# Altium PCB BlueStone_Terminal_V2.11.PcbDoc (part 1 of 2)
Units mm, origin at the board's own origin, x right, y up, seen from the top; angles counter-clockwise.
Board outline 57 x 62 mm, 2 copper layers (TopLayer, BottomLayer); 39 components, 46 nets, 230 pads, 117 vias.
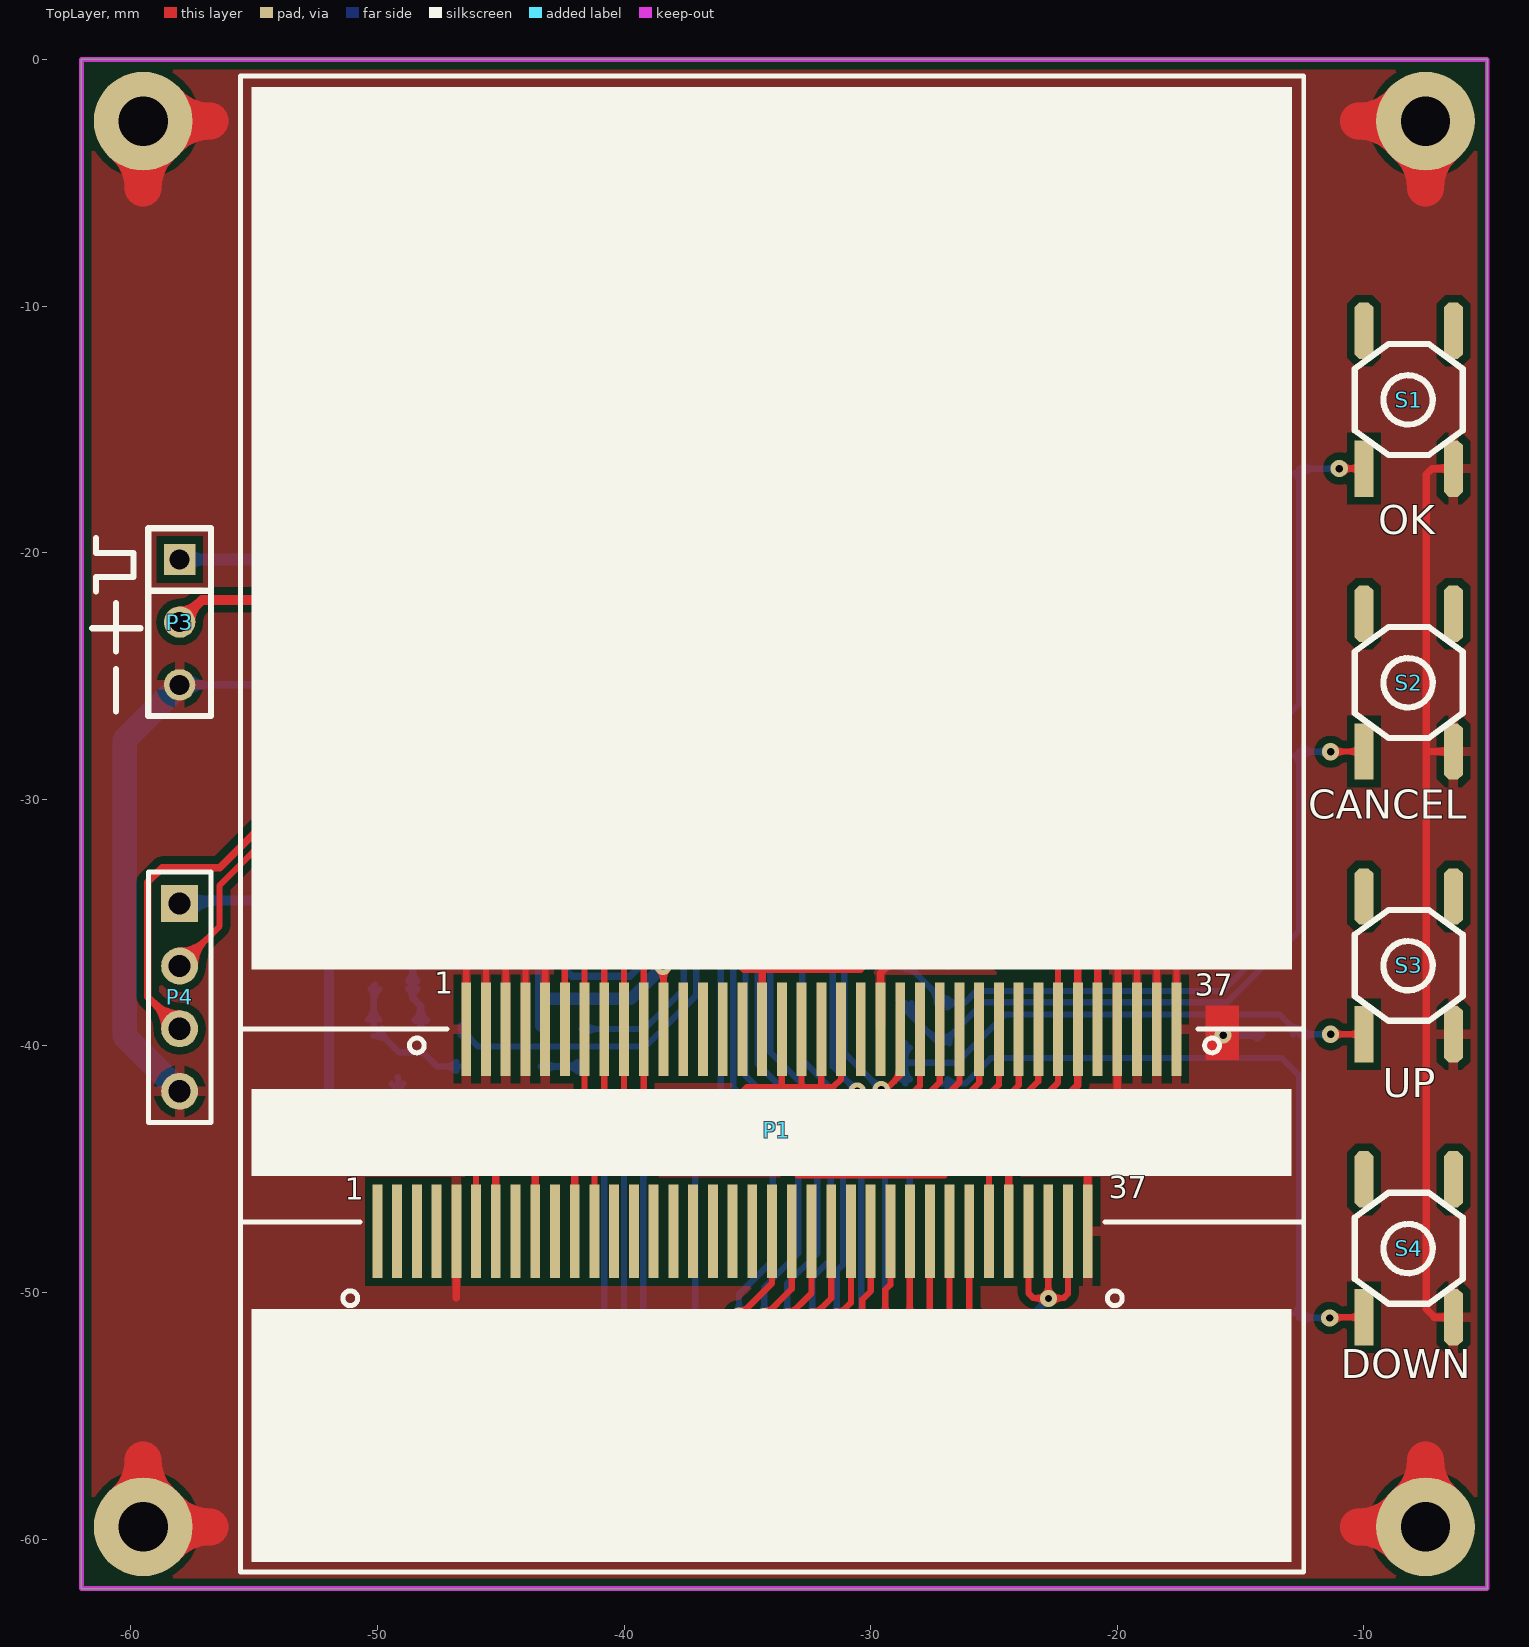
[diagram p0: TopLayer view]
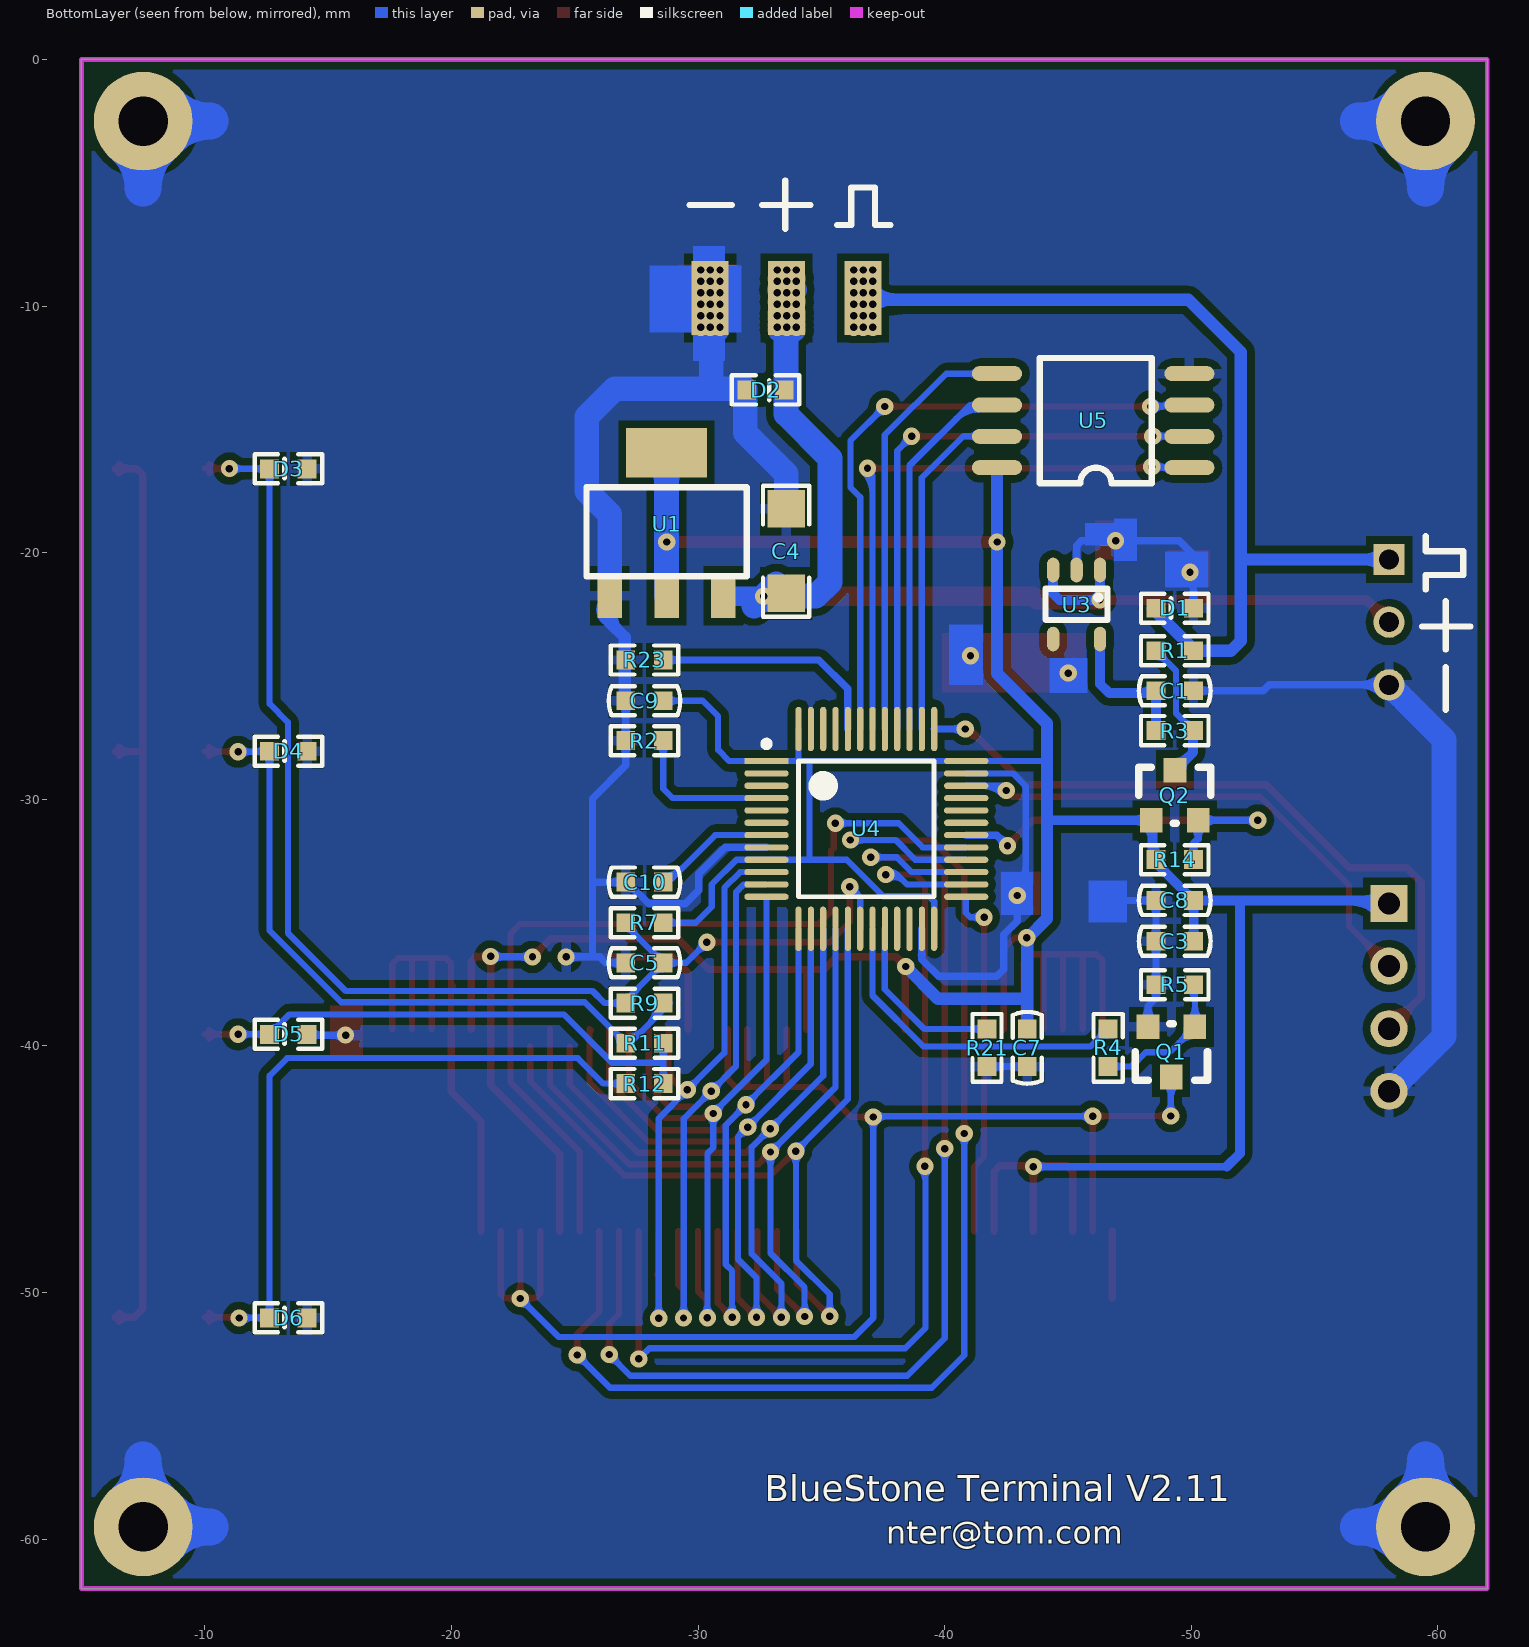
[diagram p1: BottomLayer view, seen from below]

## Layer stack, top to bottom
TopLayer: signal copper 0.0356
Dielectric: core 0.32, FR-4, Dk 4.8
BottomLayer: signal copper 0.0356

## Board outline
-62,-62 -5,-62 -5,0 -62,0

## Design rules (kind name [scope] priority, off if disabled: settings)
Clearance Clearance_2 [All] p1 off: gap=0.3
Clearance Clearance_0 [All] p2: gap=0.203
Clearance Clearance_1 [All] p3 off: gap=0.25
FabricationTestPointUsage TestPointUsage [All] p1: valid=0 allowmultiple=FALSE
FabricationTestpoint Testpoint [All] p1: side=3 testpointundercomponent=TRUE minsize=1.016 maxsize=2.54 preferedsize=1.524 minholesize=0.508 maxholesize=1.016 preferedholesize=0.813 testpointgrid=0.025 allowsidetop=TRUE allowsidebottom=TRUE usegrid=TRUE gridtolerance=0
HoleSize [All] p1: absolutevalues=TRUE maxlimit=10 minlimit=0.025 maxpercent=80.000 minpercent=20.000
PolygonConnect [All] p1: connectstyle=Relief reliefconductorwidth=0.4 reliefentries=4 polygonreliefangle="90 Angle"
RoutingVias [All] p1: holewidth=0.4 width=0.8 viastyle="Through Hole" minholewidth=0.2 minwidth=0.406 maxholewidth=0.711 maxwidth=1.27
SilkscreenOverComponentPads [All] p1: minsilkscreentomaskgap=0.254
SolderMaskExpansion [All] p1: expansion=0.102
Width [All] p1: maxlimit=5 minlimit=0.2 preferedwidth=0.203 minimp=50.000000 maximp=50.000000 favimp=50.000000
24 further rules are at their usual default settings.

## Components (designator, comment, footprint, x,y, rotation, side; value= is the part's Value field where it differs from the comment)
C1 "475" 1608(0603C) -48.568,-25.595 r180 bottom
C3 "475" 1608(0603C) -50.092,-35.75 r0 bottom
C4 "22uF/16V" 3216(1206B) -33.575,-21.65 r90 bottom
C5 "102" 1608(0603C) -28.592,-36.631 r0 bottom
C7 "475" 1608(0603C) -43.353,-39.312 r270 bottom
C8 "475" 1608(0603C) -50.092,-34.1 r0 bottom
C9 "475" 1608(0603C) -28.592,-26.005 r0 bottom
C10 "104" 1608(0603C) -28.592,-33.355 r0 bottom
D1 "PSD05C" SOD523(0603R) -50.09,-22.25 r0 bottom
D2 "PSD12C" SOD523(0603R) -31.975,-13.4 r180 bottom
D3 "PSD05C" SOD523(0603R) -14.15,-16.6 r0 bottom
D4 "PSD05C" SOD523(0603R) -14.15,-28.05 r0 bottom
D5 "PSD05C" SOD523(0603R) -14.15,-39.53 r0 bottom
D6 "PSD05C" SOD523(0603R) -14.15,-51.025 r0 bottom
P1 "37PIN_D1" Z240_D1 -46.4,-40.018 r0 top
P3 "" SIP3 -58.02,-20.275 r270 top
P4 "Header 4" HDR1X4 -58.02,-34.22 r270 top
Q1 "SI2302" SOT-23 -50.15,-39.225 r0 bottom
Q2 "SI2302" SOT-23 -48.375,-30.85 r180 bottom
R1 "18R" 1608(0603R) -50.09,-23.975 r0 bottom
R2 "NC" 1608(0603R) -28.59,-27.62 r0 bottom
R3 "2K 1%" 1608(0603R) -50.09,-27.21 r0 bottom
R4 "2K 1%" 1608(0603R) -46.625,-40.834 r90 bottom
R5 "10K 1%" 1608(0603R) -48.57,-37.515 r180 bottom
R7 "10K 1%" 1608(0603R) -28.59,-35 r0 bottom
R9 "2K 1%" 1608(0603R) -27.07,-38.263 r180 bottom
R11 "2K 1%" 1608(0603R) -27.07,-39.894 r180 bottom
R12 "2K 1%" 1608(0603R) -28.59,-41.525 r0 bottom
R14 "10K 1%" 1608(0603R) -50.09,-32.445 r0 bottom
R21 "10K 1%" 1608(0603R) -41.717,-39.314 r270 bottom
R23 "10K 1%" 1608(0603R) -28.59,-24.35 r0 bottom
S1 "" KEY-3 -10,-16.588 r90 top
S2 "" KEY-3 -10,-28.059 r90 top
S3 "" KEY-3 -10,-39.529 r90 top
S4 "" KEY-3 -10,-51 r90 top
U1 "LM1117-3.3" SOT-223 -31.025,-21.75 r180 bottom
U3 "MIC5205-5.0BM5" SOT23-5 -46.3,-20.7 r270 bottom
U4 "STM32F103C8T6" LQFP48_N -36.825,-31.2 r180 bottom
U5 "W25Q80BVSSIG" "SO-8(Width: 7.8mm)" -49.925,-16.55 r0 bottom

## Footprints (in the part's own frame and the unit in brackets; to place one, negate y for a bottom-side part, rotate by r counter-clockwise, add the part's x,y. Pads: shape width x height; smd on the part's side, far side on the other; paste and mask are expansions set on the pad)
1608(0603C) [mil]
  rect 30x30 smd: 1(0,0) 2(60,0)
  silkscreen extent -27,-23 87,23
1608(0603R) [mil]
  rect 30x30 smd: 1(0,0) 2(60,0)
  silkscreen extent -24,-23 84,23
3216(1206B) [mil]
  rect 60x60 smd: 1(0,0) 2(135,0)
  silkscreen extent -37,-37 172,37
HDR1X4 [mm] "Connector; Header; 4 Position"
  rect 1.5x1.5 hole 0.9: 1(0,0)
  round 1.5 hole 0.9: 2(2.54,0) 3(5.08,0) 4(7.62,0)
  silkscreen extent -1.27,-1.27 8.89,1.27
KEY-3 [mil]
  rect 90x30 smd: 1(0,0)
  oct 90x30 smd: 2(0,-142.89) 3(220,-0.02) 4(220,-142.89)
  silkscreen extent 22,-158 199,15
LQFP48_N [mm]
  rect 1.8x0.25 smd: 1(-4.05,2.75)
  oval 1.8x0.25 smd: 2(-4.05,2.25) 3(-4.05,1.75) 4(-4.05,1.25) 5(-4.05,0.75) 6(-4.05,0.25) 7(-4.05,-0.25) 8(-4.05,-0.75) 9(-4.05,-1.25) 10(-4.05,-1.75) 11(-4.05,-2.25) 12(-4.05,-2.75) 25(4.05,-2.75) 26(4.05,-2.25) 27(4.05,-1.75) 28(4.05,-1.25) 29(4.05,-0.75) 30(4.05,-0.25) 31(4.05,0.25) 32(4.05,0.75) 33(4.05,1.25) 34(4.05,1.75) 35(4.05,2.25) 36(4.05,2.75)
  oval 0.25x1.8 smd: 13(-2.75,-4.05) 14(-2.25,-4.05) 15(-1.75,-4.05) 16(-1.25,-4.05) 17(-0.75,-4.05) 18(-0.25,-4.05) 19(0.25,-4.05) 20(0.75,-4.05) 21(1.25,-4.05) 22(1.75,-4.05) 23(2.25,-4.05) 24(2.75,-4.05) 37(2.75,4.05) 38(2.25,4.05) 39(1.75,4.05) 40(1.25,4.05) 41(0.75,4.05) 42(0.25,4.05) 43(-0.25,4.05) 44(-0.75,4.05) 45(-1.25,4.05) 46(-1.75,4.05) 47(-2.25,4.05) 48(-2.75,4.05)
  silkscreen extent -4.18,-2.75 2.75,3.57
SIP3 [mil]
  rect 50x50 hole 32: 1(0,0)
  round 50 hole 32: 2(100,0) 3(200,0)
  silkscreen extent -50,-50 250,50
"SO-8(Width: 7.8mm)" [mil]
  oval 80x24 smd: 1(0,0) 2(0,-50) 3(0,-100) 4(0,-150) 5(307.09,-150) 6(307.09,-100) 7(307.09,-50) 8(307.09,0)
  silkscreen extent 60,-175 239,25
SOD523(0603R) [mil]
  rect 30x30 smd: 1(0,0) 2(60,0)
  silkscreen extent -24,-23 84,23
SOT23-5 [mm]
  oval 1x0.5 smd: 1(0,0) 2(0,-0.95) 3(0,-1.9) 4(2.8,-1.9) 5(2.8,0)
  silkscreen extent 0.76,-2.21 2.03,0.3
SOT-23 [mil]
  rect 36x39.37 smd: 1(0,0) 2(75,0) 3(38,80)
  silkscreen extent -20,-5 95,85
SOT-223 [mm]
  rect 0.99x1.8 smd: 1(-4.6,0) 2(-2.3,0) 3(0,0)
  rect 3.28x2 smd: 2(-2.3,5.8)
  silkscreen extent -5.55,0.8 0.95,4.4
Z240_D1 [mm]
  rect 0.4x3.8 smd: 1_1(-3.6,-7.5) 1_2(-2.8,-7.5) 1_3(-2,-7.5) 1_4(-1.2,-7.5) 1_5(-0.4,-7.5) 1_6(0.4,-7.5) 1_7(1.2,-7.5) 1_8(2,-7.5) 1_9(2.8,-7.5) 1_10(3.6,-7.5) 1_11(4.4,-7.5) 1_12(5.2,-7.5) 1_13(6,-7.5) 1_14(6.8,-7.5) 1_15(7.6,-7.5) 1_16(8.4,-7.5) 1_17(9.2,-7.5) 1_18(10,-7.5) 1_19(10.8,-7.5) 1_20(11.6,-7.5) 1_21(12.4,-7.5) 1_22(13.2,-7.5) 1_23(14,-7.5) 1_24(14.8,-7.5) 1_25(15.6,-7.5) 1_26(16.4,-7.5) 1_27(17.2,-7.5) 1_28(18,-7.5) 1_29(18.8,-7.5) 1_30(19.6,-7.5) 1_31(20.4,-7.5) 1_32(21.2,-7.5) 1_33(22,-7.5) 1_34(22.8,-7.5) 1_35(23.6,-7.5) 1_36(24.4,-7.5) 1_37(25.2,-7.5) 2_1(0,0.7) 2_2(0.8,0.7) 2_3(1.6,0.7) 2_4(2.4,0.7) 2_5(3.2,0.7) 2_6(4,0.7) 2_7(4.8,0.7) 2_8(5.6,0.7) 2_9(6.4,0.7) 2_10(7.2,0.7) 2_11(8,0.7) 2_12(8.8,0.7) 2_13(9.6,0.7) 2_14(10.4,0.7) 2_15(11.2,0.7) 2_16(12,0.7) 2_17(12.8,0.7) 2_18(13.6,0.7) 2_19(14.4,0.7) 2_20(15.2,0.7) 2_21(16,0.7) 2_22(16.8,0.7) 2_23(17.6,0.7) 2_24(18.4,0.7) 2_25(19.2,0.7) 2_26(20,0.7) 2_27(20.8,0.7) 2_28(21.6,0.7) 2_29(22.4,0.7) 2_30(23.2,0.7) 2_31(24,0.7) 2_32(24.8,0.7) 2_33(25.6,0.7) 2_34(26.4,0.7) 2_35(27.2,0.7) 2_36(28,0.7) 2_37(28.8,0.7)
  silkscreen extent -9.16,-21.31 33.96,39.35

## Part data
C1 C3 C5 C7 C8 C9: library part Cap, "Capacitor"
C4: library part "Cap Pol1", "Polarized Capacitor (Radial)"
C10: library part CAP, "Capacitor"
D1 D2 D3 D4 D5 D6: library part RSBC6.8CS, "Default Diode"
P3: library part "Header 3", "Header, 3-Pin"
P4: "Header, 4-Pin"
Q1 Q2: library part "NMOS  (SOT23)"
R1 R2 R3 R4 R5 R7 R9 R11 R12 R14 R21 R23: library part Res2, "Resistor"
S1 S2 S3 S4: library part SW-PB, "Switch"
U1: library part LM1117
U3: library part MIC5205
U4: library part STM32F103C
U5: library part W55X16

## Free pads (board coordinates)
  round 4 hole 2: 0(-59.5,-59.5) 0(-59.5,-2.5) 0(-7.5,-59.5) 0(-7.5,-2.5)
  rect 1.5x3 smd paste-2 mask-2: 0(-36.69,-9.67) 0(-33.59,-9.67) 0(-30.49,-9.67)
  rect 1.5x3 smd far side: 0(-36.69,-9.67) 0(-33.59,-9.67) 0(-30.49,-9.67)

## Via types
v1: diameter 0.7, hole 0.3, TopLayer to BottomLayer, tented both sides, 117 vias

## Nets (pads, with @x,y where several pads share a name; then routed paths per layer and width w, separated by ;. In a path a pad name is that pad's centre, name@x,y a point inside that pad or via, vN(x,y) a via of type N, cw(c..) or ccw(c..) an arc to the next point about the centre after c; other vN are vias at no path point)
BOOT0: R23.1 U4.44 | length 12.7
  BottomLayer w0.3: -36.075,-25.715 U4.44@-36.075,-27.15 -36.075,-25.523 -34.902,-24.35 R23.1@-28.7,-24.35 ; -29.148,-24.35 ccw(c-29.148,-23.792) -28.753,-24.187 cw(c-29.148,-23.792) -29.148,-24.35 ; -29.148,-24.35 cw(c-29.148,-24.908) -28.753,-24.513 ccw(c-29.148,-24.908) -29.148,-24.35
BOOT1: R21.1 U4.20 | length 9.2
  BottomLayer w0.254: R21.1@-41.717,-39.314 -39.184,-39.314 -37.575,-37.705 U4.20@-37.575,-35.25 ; -41.104,-39.314 ccw(c-41.104,-39.927) -41.538,-39.493 cw(c-41.104,-39.927) -41.104,-39.314 ; -41.104,-39.314 cw(c-41.104,-38.701) -41.538,-39.134 ccw(c-41.104,-38.701) -41.104,-39.314
DGND: C1.2 C3.2 C4.2 C5.2 C7.2 C8.2 C9.2 C10.2 D1.1 D2.1 D3.1 D4.1 D5.1 D6.1 P1.1_5 P1.1_37 P1.2_1 P1.2_2 P1.2_3 P1.2_4 P1.2_5 P1.2_22 P1.2_34 P1.2_35 P1.2_36 P1.2_37 P3.3 P4.4 pad.0@-7.5,-2.5 pad.0@-7.5,-59.5 pad.0@-30.49,-9.67 pad.0@-59.5,-2.5 pad.0@-59.5,-59.5 Q1.2 R2.2 R5.1 R21.2 R23.2 S1.2 S2.2 S3.2 S4.2 U1.1 U3.2 U4.8 U4.23 U4.35 U4.47 U5.4 | length 461.6
  TopLayer w0.254: P1.2_1@-46.4,-39.318 -46.4,-36.53 -46.15,-36.28 -45.53,-36.28 ; P1.2_2@-45.6,-39.318 -45.6,-36.35 -45.53,-36.28 ; P1.2_3@-44.8,-39.318 -44.8,-36.33 -44.75,-36.28 ; P1.2_4@-44,-39.318 -44,-36.32 -43.96,-36.28 ; P1.2_5@-43.2,-39.318 -43.2,-36.64 -43.55,-36.29 -43.612,-36.29 -43.622,-36.28 -43.96,-36.28 ; P1.2_34@-20,-39.318 -19.98,-39.298 -19.98,-36.65 -19.76,-36.43 -19.18,-36.43 ; P1.2_35@-19.2,-39.318 -19.2,-36.45 -19.18,-36.43 ; P1.2_36@-18.4,-39.318 -18.4,-36.5 -18.33,-36.43 ; P1.2_37@-17.6,-39.318 -17.6,-36.67 -17.84,-36.43 -18.33,-36.43 ; -45.53,-36.28 -44.75,-36.28 ; -44.75,-36.28 -43.96,-36.28 ; -19.18,-36.43 -18.33,-36.43 ; P1.2_34@-20.052,-37.566 ccw(c-20.225,-37.393) -19.98,-37.393 cw(c-20.225,-37.393) P1.2_34@-20.052,-37.566
  TopLayer w0.3: -46.8,-50.22 P1.1_5@-46.8,-47.518 ; P1.2_22@-29.6,-39.318 -29.6,-37.05 -28.94,-36.39 ; -28.92,-36.37 -28.94,-36.39 ; v1@-24.67,-36.37 v1(-24.65,-36.39) -28.94,-36.39 ; P1.1_37@-21.2,-47.518 -21.2,-43.05 -20,-41.85 P1.2_34@-20,-39.318 ; S4.2@-6.37,-51 -7.14,-51 -7.48,-50.66 -7.48,-28.17 ; S2.2@-6.37,-28.059 -7.369,-28.059 -7.48,-28.17 ; S1.2@-6.37,-16.588 -7.238,-16.588 -7.48,-16.83 -7.48,-28.17 ; -25.133,-36.39 ccw(c-25.133,-35.907) -24.791,-36.249 cw(c-25.133,-35.907) -25.133,-36.39 ; -25.133,-36.39 cw(c-25.133,-36.873) -24.791,-36.531 ccw(c-25.133,-36.873) -25.133,-36.39 ; -6.928,-51 ccw(c-6.928,-50.442) -6.534,-50.837 cw(c-6.928,-50.442) -6.928,-51 ; -6.928,-51 cw(c-6.928,-51.558) -6.534,-51.163 ccw(c-6.928,-51.558) -6.928,-51 ; -6.928,-28.059 ccw(c-6.928,-27.501) -6.534,-27.895 cw(c-6.928,-27.501) -6.928,-28.059 ; -6.928,-28.059 cw(c-6.928,-28.616) -6.534,-28.222 ccw(c-6.928,-28.616) -6.928,-28.059 ; -6.928,-16.588 ccw(c-6.928,-16.03) -6.534,-16.425 cw(c-6.928,-16.03) -6.928,-16.588 ; -6.928,-16.588 cw(c-6.928,-17.146) -6.534,-16.751 ccw(c-6.928,-17.146) -6.928,-16.588
  TopLayer w1.5: -59.5,-5.21 pad.0@-59.5,-2.5 -56.79,-2.5 ; -7.5,-5.21 pad.0@-7.5,-2.5 -10.21,-2.5 ; -59.5,-56.79 ccw(c-57.188,-56.79) -58.689,-58.549 cw(c-57.188,-56.79) -59.5,-56.79 ; -59.5,-56.79 cw(c-61.812,-56.79) -60.311,-58.549 ccw(c-61.812,-56.79) -59.5,-56.79 ; -59.5,-56.79 pad.0@-59.5,-59.5 -56.79,-59.5 ; -59.5,-5.21 ccw(c-61.812,-5.21) -60.311,-3.451 cw(c-61.812,-5.21) -59.5,-5.21 ; -59.5,-5.21 cw(c-57.188,-5.21) -58.689,-3.451 ccw(c-57.188,-5.21) -59.5,-5.21 ; -56.79,-59.5 ccw(c-56.79,-61.812) -58.549,-60.311 cw(c-56.79,-61.812) -56.79,-59.5 ; -56.79,-59.5 cw(c-56.79,-57.188) -58.549,-58.689 ccw(c-56.79,-57.188) -56.79,-59.5 ; -56.79,-2.5 ccw(c-56.79,-4.812) -58.549,-3.311 cw(c-56.79,-4.812) -56.79,-2.5 ; -56.79,-2.5 cw(c-56.79,-0.188) -58.549,-1.689 ccw(c-56.79,-0.188) -56.79,-2.5 ; -10.21,-59.5 ccw(c-10.21,-57.188) -8.451,-58.689 cw(c-10.21,-57.188) -10.21,-59.5 ; -10.21,-59.5 cw(c-10.21,-61.812) -8.451,-60.311 ccw(c-10.21,-61.812) -10.21,-59.5 ; -10.21,-59.5 pad.0@-7.5,-59.5 -7.5,-56.79 ; -10.21,-2.5 ccw(c-10.21,-0.188) -8.451,-1.689 cw(c-10.21,-0.188) -10.21,-2.5 ; -10.21,-2.5 cw(c-10.21,-4.812) -8.451,-3.311 ccw(c-10.21,-4.812) -10.21,-2.5 ; -7.5,-56.79 ccw(c-5.188,-56.79) -6.689,-58.549 cw(c-5.188,-56.79) -7.5,-56.79 ; -7.5,-56.79 cw(c-9.812,-56.79) -8.311,-58.549 ccw(c-9.812,-56.79) -7.5,-56.79 ; -7.5,-5.21 ccw(c-9.812,-5.21) -8.311,-3.451 cw(c-9.812,-5.21) -7.5,-5.21 ; -7.5,-5.21 cw(c-5.188,-5.21) -6.689,-3.451 ccw(c-5.188,-5.21) -7.5,-5.21
  BottomLayer w0.254: -43.29,-33.85 -43.29,-29.468 -42.772,-28.95 U4.35@-40.875,-28.95 ; -43.29,-33.743 ccw(c-42.783,-33.743) -43.142,-34.102 cw(c-42.783,-33.743) -43.29,-33.743 ; -43.29,-33.13 ccw(c-42.17,-33.13) -42.962,-33.922 cw(c-42.17,-33.13) -43.29,-33.13 ; -43.29,-32.517 ccw(c-41.557,-32.517) -42.782,-33.742 cw(c-41.557,-32.517) -43.29,-32.517
  BottomLayer w0.3: P3.3@-57.995,-25.33 P3.3@-58.02,-25.355 -53.155,-25.355 -52.915,-25.595 -50.05,-25.595 C1.2@-50.06,-25.585 ; D1.1@-49.95,-22.25 -50.08,-22.12 -50.08,-20.08 ; C8.2@-48.568,-34.1 C3.2@-48.568,-35.75 -48.568,-38.057 ; C8.2@-48.44,-34.1 -46.68,-34.1 ; Q1.2@-48.245,-39.225 -48.245,-38.38 -48.568,-38.057 ; U3.2@-45.35,-20.7 -45.35,-19.71 -45.54,-19.52 -49.52,-19.52 -50.08,-20.08 ; C7.2@-43.353,-40.834 R21.2@-41.717,-40.834 ; v1(-42.94,-33.9) -42.94,-34.94 -42.4,-35.48 -42.4,-36.9 -42.12,-37.18 -39.76,-37.18 -39.075,-36.495 U4.23@-39.075,-35.25 ; U4.8@-32.775,-31.95 -31.1,-31.95 -30.03,-33.02 -30.03,-33.68 -29.475,-34.235 -28.01,-34.235 -27.13,-33.355 C10.2@-27.068,-33.355 -25.795,-33.355 ; C5.2@-27.2,-36.631 C5.2@-27.068,-36.631 -26.25,-36.631 -26.009,-36.39 -25.72,-36.39 ; C9.2@-27.068,-26.005 -27.068,-28.622 -25.72,-29.97 -25.72,-36.39 ; v1(-24.65,-36.39) -25.72,-36.39 ; v1@-15.72,-39.57 -14.19,-39.57 D5.1@-14.15,-39.53 ; -56.849,-25.355 ccw(c-56.849,-26.526) -57.677,-25.698 cw(c-56.849,-26.526) -56.849,-25.355 ; -56.849,-25.355 cw(c-56.849,-24.184) -57.677,-25.012 ccw(c-56.849,-24.184) -56.849,-25.355 ; -50.65,-25.595 ccw(c-50.65,-25.037) -50.255,-25.432 cw(c-50.65,-25.037) -50.65,-25.595 ; -50.65,-25.595 cw(c-50.65,-26.153) -50.255,-25.758 ccw(c-50.65,-26.153) -50.65,-25.595 ; -50.08,-20.08 ccw(c-49.351,-20.08) -49.821,-20.637 cw(c-49.351,-20.08) -50.08,-20.08 ; -48.568,-38.057 ccw(c-49.084,-38.057) -48.729,-37.683 cw(c-49.084,-38.057) -48.568,-38.057 ; -48.568,-38.057 cw(c-48.043,-38.057) -48.409,-37.681 ccw(c-48.043,-38.057) -48.568,-38.057 ; -48.568,-36.308 ccw(c-49.126,-36.308) -48.731,-35.913 cw(c-49.126,-36.308) -48.568,-36.308 ; -48.568,-36.308 cw(c-48.01,-36.308) -48.405,-35.913 ccw(c-48.01,-36.308) -48.568,-36.308 ; -48.568,-35.192 ccw(c-48.01,-35.192) -48.405,-35.587 cw(c-48.01,-35.192) -48.568,-35.192 ; -48.568,-35.192 cw(c-49.126,-35.192) -48.731,-35.587 ccw(c-49.126,-35.192) -48.568,-35.192 ; -48.568,-34.658 ccw(c-49.126,-34.658) -48.731,-34.263 cw(c-49.126,-34.658) -48.568,-34.658 ; -48.568,-34.658 cw(c-48.01,-34.658) C8.2@-48.405,-34.263 ; -48.568,-34.658 cw(c-48.01,-34.658) C8.2@-48.405,-34.263 ; C8.2@-48.405,-34.263 cw(c-48.01,-34.658) -48.01,-34.1 ; C8.2@-48.405,-34.263 cw(c-48.01,-34.658) -48.01,-34.1 ; -48.245,-38.441 ccw(c-47.503,-38.441) -48.028,-38.965 cw(c-47.503,-38.441) -48.245,-38.441 ; -48.245,-38.441 cw(c-48.987,-38.441) -48.462,-38.965 ccw(c-48.987,-38.441) -48.245,-38.441 ; -48.01,-34.1 cw(c-48.01,-33.542) -48.405,-33.937 ccw(c-48.01,-33.542) -48.01,-34.1 ; -47.413,-19.52 ccw(c-47.413,-19.037) -47.071,-19.379 cw(c-47.413,-19.037) -47.413,-19.52 ; -47.413,-19.52 cw(c-47.413,-20.003) -47.071,-19.661 ccw(c-47.413,-20.003) -47.413,-19.52 ; -46.447,-19.52 ccw(c-46.447,-20.003) -46.789,-19.661 cw(c-46.447,-20.003) -46.447,-19.52 ; -46.447,-19.52 cw(c-46.447,-19.037) -46.789,-19.379 ccw(c-46.447,-19.037) -46.447,-19.52 ; -42.94,-34.383 ccw(c-43.423,-34.383) -43.081,-34.041 cw(c-43.423,-34.383) -42.94,-34.383 ; -42.94,-34.383 cw(c-42.457,-34.383) -42.799,-34.041 ccw(c-42.457,-34.383) -42.94,-34.383 ; -27.068,-26.563 ccw(c-27.626,-26.563) -27.231,-26.168 cw(c-27.626,-26.563) -27.068,-26.563 ; -27.068,-26.563 cw(c-26.51,-26.563) -26.905,-26.168 ccw(c-26.51,-26.563) -27.068,-26.563 ; -26.51,-36.631 ccw(c-26.51,-37.189) -26.905,-36.795 cw(c-26.51,-37.189) -26.51,-36.631 ; -26.51,-36.631 cw(c-26.51,-36.074) -26.905,-36.468 ccw(c-26.51,-36.074) -26.51,-36.631 ; -26.51,-33.355 ccw(c-26.51,-33.913) -26.905,-33.518 cw(c-26.51,-33.913) -26.51,-33.355 ; -26.51,-33.355 cw(c-26.51,-32.797) -26.905,-33.192 ccw(c-26.51,-32.797) -26.51,-33.355 ; -25.133,-36.39 ccw(c-25.133,-35.907) -24.791,-36.249 cw(c-25.133,-35.907) -25.133,-36.39 ; -25.133,-36.39 cw(c-25.133,-36.873) -24.791,-36.531 ccw(c-25.133,-36.873) -25.133,-36.39 ; D1.1@-50.253,-22.087 ccw(c-50.672,-21.668) -50.08,-21.668 cw(c-50.672,-21.668) D1.1@-50.253,-22.087 ; -50.08,-21.716 ccw(c-49.556,-21.716) -49.927,-22.087 cw(c-49.556,-21.716) -50.08,-21.716 ; -50.08,-21.587 cw(c-49.153,-21.587) -49.809,-20.931 ccw(c-49.153,-21.587) -50.08,-21.587 ; R5.1@-48.733,-37.352 ccw(c-49.133,-36.952) -48.568,-36.952 cw(c-49.133,-36.952) R5.1@-48.733,-37.352 ; -48.568,-36.962 ccw(c-48.017,-36.962) -48.407,-37.352 cw(c-48.017,-36.962) -48.568,-36.962 ; C7.2@-43.19,-40.999 cw(c-42.791,-41.398) -42.791,-40.834 ccw(c-42.791,-41.398) C7.2@-43.19,-40.999 ; C7.2@-43.19,-40.673 ccw(c-42.8,-40.283) -42.8,-40.834 cw(c-42.8,-40.283) C7.2@-43.19,-40.673 ; -42.285,-40.834 cw(c-42.285,-41.405) -41.881,-41.001 ccw(c-42.285,-41.405) -42.285,-40.834 ; -42.265,-40.834 ccw(c-42.265,-40.29) -41.881,-40.675 cw(c-42.265,-40.29) -42.265,-40.834 ; -27.568,-33.793 cw(c-27.068,-34.293) -27.068,-33.586 ccw(c-27.068,-34.293) -27.568,-33.793 ; C10.2@-27.419,-33.644 ccw(c-27.707,-33.355) -27.299,-33.355 cw(c-27.707,-33.355) C10.2@-27.419,-33.644 ; R2.2@-27.229,-27.783 cw(c-27.619,-28.173) -27.068,-28.173 ccw(c-27.619,-28.173) R2.2@-27.229,-27.783 ; R2.2@-27.229,-27.457 ccw(c-27.619,-27.067) -27.068,-27.067 cw(c-27.619,-27.067) R2.2@-27.229,-27.457 ; -27.068,-28.183 cw(c-26.503,-28.183) -26.903,-27.783 ccw(c-26.503,-28.183) -27.068,-28.183 ; -27.068,-27.057 ccw(c-26.503,-27.057) -26.903,-27.457 cw(c-26.503,-27.057) -27.068,-27.057 ; v1@-15.569,-39.701 cw(c-15.251,-40.019) -15.251,-39.57 ccw(c-15.251,-40.019) v1@-15.569,-39.701 ; v1@-15.569,-39.419 ccw(c-15.203,-39.053) -15.203,-39.57 cw(c-15.203,-39.053) v1@-15.569,-39.419 ; -14.804,-39.57 ccw(c-14.804,-38.876) -14.313,-39.367 cw(c-14.804,-38.876) -14.804,-39.57 ; -14.611,-39.57 cw(c-14.611,-39.991) -14.313,-39.693 ccw(c-14.611,-39.991) -14.611,-39.57
  BottomLayer w0.5: C9.2@-27.03,-26.005 -27.03,-23.43 -26.425,-22.825 U1.1@-26.425,-21.75 ; -26.425,-22.746 ccw(c-27.016,-22.746) -26.598,-22.328 cw(c-27.016,-22.746) -26.425,-22.746 ; -26.425,-22.746 cw(c-25.834,-22.746) -26.252,-22.328 ccw(c-25.834,-22.746) -26.425,-22.746 ; C9.2@-27.161,-25.912 ccw(c-27.476,-25.597) -27.03,-25.597 cw(c-27.476,-25.597) C9.2@-27.161,-25.912 ; R23.2@-27.159,-24.443 cw(c-27.469,-24.753) -27.03,-24.753 ccw(c-27.469,-24.753) R23.2@-27.159,-24.443 ; R23.2@-27.159,-24.257 ccw(c-27.469,-23.947) -27.03,-23.947 cw(c-27.469,-23.947) R23.2@-27.159,-24.257 ; -26.695,-23.095 ccw(c-27.136,-22.654) -26.626,-22.296 cw(c-27.136,-22.654) -26.695,-23.095 ; -26.274,-22.674 ccw(c-26.641,-22.307) -26.216,-22.008 cw(c-26.641,-22.307) -26.274,-22.674
  BottomLayer w1: P4.4@-58.02,-41.84 -60.25,-39.61 -60.25,-27.585 P3.3@-58.02,-25.355 ; C4.2@-33.575,-18.221 -33.575,-16.795 -31.91,-15.13 -31.91,-13.35 -26.63,-13.35 -25.49,-14.49 -25.49,-17.51 -26.425,-18.445 U1.1@-26.425,-21.75 ; -30.54,-13.35 pad.0@-30.54,-9.67 ; pad.0@-30.784,-8.894 cw(c-31.373,-9.483) pad.0@-30.54,-9.483 ; pad.0@-30.784,-8.894 cw(c-31.373,-9.483) pad.0@-30.54,-9.483 ; pad.0@-30.784,-8.894 cw(c-31.373,-9.483) pad.0@-30.54,-9.483 ; pad.0@-30.784,-8.894 cw(c-31.373,-9.483) pad.0@-30.54,-9.483 ; pad.0@-30.54,-9.676 cw(c-29.434,-9.676) pad.0@-30.216,-8.894 ; pad.0@-30.54,-9.676 cw(c-29.434,-9.676) pad.0@-30.216,-8.894 ; pad.0@-30.54,-9.676 cw(c-29.434,-9.676) pad.0@-30.216,-8.894 ; pad.0@-30.54,-9.676 cw(c-29.434,-9.676) pad.0@-30.216,-8.894 ; pad.0@-30.784,-10.966 ccw(c-31.373,-10.377) -30.54,-10.377 cw(c-31.373,-10.377) pad.0@-30.784,-10.966 ; pad.0@-30.784,-10.754 cw(c-31.373,-11.343) -30.54,-11.343 ccw(c-31.373,-11.343) pad.0@-30.784,-10.754 ; pad.0@-30.784,-10.501 ccw(c-31.373,-9.912) -30.54,-9.912 cw(c-31.373,-9.912) pad.0@-30.784,-10.501 ; pad.0@-30.784,-10.289 cw(c-31.373,-10.878) -30.54,-10.878 ccw(c-31.373,-10.878) pad.0@-30.784,-10.289 ; pad.0@-30.784,-9.824 cw(c-31.373,-10.413) -30.54,-10.413 ccw(c-31.373,-10.413) pad.0@-30.784,-9.824 ; pad.0@-30.784,-9.359 cw(c-31.373,-9.948) -30.54,-9.948 ccw(c-31.373,-9.948) pad.0@-30.784,-9.359 ; -30.54,-11.536 cw(c-29.434,-11.536) -30.216,-10.754 ccw(c-29.434,-11.536) -30.54,-11.536 ; pad.0@-30.54,-11.071 cw(c-29.434,-11.071) -30.216,-10.289 ccw(c-29.434,-11.071) pad.0@-30.54,-11.071 ; pad.0@-30.54,-10.606 cw(c-29.434,-10.606) -30.216,-9.824 ccw(c-29.434,-10.606) pad.0@-30.54,-10.606 ; pad.0@-30.54,-10.184 ccw(c-29.434,-10.184) -30.216,-10.966 cw(c-29.434,-10.184) pad.0@-30.54,-10.184 ; pad.0@-30.54,-10.141 cw(c-29.434,-10.141) -30.216,-9.359 ccw(c-29.434,-10.141) pad.0@-30.54,-10.141 ; pad.0@-30.54,-9.941 cw(c-29.845,-9.941) -30.183,-9.334 ccw(c-29.845,-9.941) pad.0@-30.54,-9.941 ; pad.0@-30.54,-9.719 ccw(c-29.434,-9.719) -30.216,-10.501 cw(c-29.434,-9.719) pad.0@-30.54,-9.719
  BottomLayer w1.5: -59.5,-5.21 pad.0@-59.5,-2.5 -56.79,-2.5 ; -7.5,-5.21 pad.0@-7.5,-2.5 -10.21,-2.5 ; -59.5,-56.79 ccw(c-57.189,-56.79) -58.689,-58.549 cw(c-57.189,-56.79) -59.5,-56.79 ; -59.5,-56.79 cw(c-61.813,-56.79) -60.311,-58.549 ccw(c-61.813,-56.79) -59.5,-56.79 ; -59.5,-56.79 pad.0@-59.5,-59.5 -56.79,-59.5 ; -59.5,-5.21 ccw(c-61.812,-5.21) -60.311,-3.451 cw(c-61.812,-5.21) -59.5,-5.21 ; -59.5,-5.21 cw(c-57.188,-5.21) -58.689,-3.451 ccw(c-57.188,-5.21) -59.5,-5.21 ; -56.79,-59.5 ccw(c-56.79,-61.812) -58.549,-60.311 cw(c-56.79,-61.812) -56.79,-59.5 ; -56.79,-59.5 cw(c-56.79,-57.188) -58.549,-58.689 ccw(c-56.79,-57.188) -56.79,-59.5 ; -56.79,-2.5 ccw(c-56.79,-4.812) -58.549,-3.311 cw(c-56.79,-4.812) -56.79,-2.5 ; -56.79,-2.5 cw(c-56.79,-0.188) -58.549,-1.689 ccw(c-56.79,-0.188) -56.79,-2.5 ; -10.21,-59.5 ccw(c-10.21,-57.188) -8.451,-58.689 cw(c-10.21,-57.188) -10.21,-59.5 ; -10.21,-59.5 cw(c-10.21,-61.812) -8.451,-60.311 ccw(c-10.21,-61.812) -10.21,-59.5 ; -10.21,-59.5 pad.0@-7.5,-59.5 -7.5,-56.79 ; -10.21,-2.5 ccw(c-10.21,-0.188) -8.451,-1.689 cw(c-10.21,-0.188) -10.21,-2.5 ; -10.21,-2.5 cw(c-10.21,-4.812) -8.451,-3.311 ccw(c-10.21,-4.812) -10.21,-2.5 ; -7.5,-56.79 ccw(c-5.188,-56.79) -6.689,-58.549 cw(c-5.188,-56.79) -7.5,-56.79 ; -7.5,-56.79 cw(c-9.812,-56.79) -8.311,-58.549 ccw(c-9.812,-56.79) -7.5,-56.79 ; -7.5,-5.21 ccw(c-9.812,-5.21) -8.311,-3.451 cw(c-9.812,-5.21) -7.5,-5.21 ; -7.5,-5.21 cw(c-5.188,-5.21) -6.689,-3.451 ccw(c-5.188,-5.21) -7.5,-5.21
  other v1: -15.71,-39.56 -45.01,-24.88 -41.05,-24.18 -49.95,-20.79 -46.93,-19.52 -30.89,-10.86 -30.5,-10.86 -30.11,-10.86 -30.89,-10.395 -30.5,-10.395 -30.11,-10.395 -30.89,-9.93 -30.5,-9.93 -30.11,-9.93 -30.89,-9.465 -30.5,-9.465 -30.11,-9.465 -30.89,-9 -30.5,-9 -30.11,-9 -30.89,-8.535 -30.5,-8.535 -30.11,-8.535
DVDD3.3: C3.1 C7.1 C8.1 C9.1 P1.1_7 P1.1_9 P1.1_11 P1.1_33 P1.2_6 P1.2_11 P1.2_16 P1.2_32 P1.2_33 P4.1 Q2.1 R7.1 R14.2 U1.2 U4.1 U4.9 U4.24 U4.36 U4.48 U5.8 | length 219
  TopLayer w0.254: v1(-43.33,-35.61) -42.84,-35.61 ; P1.2_6@-42.4,-39.318 -42.4,-36.05 -42.84,-35.61 ; -42.84,-35.61 ccw(c-42.84,-36.037) -43.162,-35.756 cw(c-42.84,-36.037) -42.84,-35.61 ; -42.84,-35.61 cw(c-42.84,-35.183) -43.162,-35.464 ccw(c-42.84,-35.183) -42.84,-35.61
  TopLayer w0.3: P1.1_7@-45.2,-47.518 -45.2,-45.1 -44.96,-44.86 -42.24,-44.86 -42,-45.1 P1.1_11@-42,-47.518 ; P1.1_9@-43.6,-47.518 v1(-43.6,-44.89) ; v1(-38.42,-36.78) -38.03,-36.39 -35.63,-36.39 -35.12,-36.9 -34.4,-36.9 ; P1.2_11@-38.4,-39.318 v1@-38.4,-36.8 ; P1.2_16@-34.4,-39.318 -34.4,-36.9 ; P1.1_33@-24.4,-47.518 -24.4,-44.39 -21.6,-41.59 P1.2_32@-21.6,-39.318 v1@-21.6,-36.38 ; v1@-23.28,-36.4 v1(-23.29,-36.39) -24.02,-35.66 -29.19,-35.66 -30.43,-36.9 -34.4,-36.9 ; v1(-21.59,-36.37) v1@-21.6,-36.38 ; P1.2_33@-20.8,-39.318 -20.8,-36.57 -21,-36.37 -21.01,-36.38 v1@-21.6,-36.38 ; v1@-43.741,-45.031 cw(c-44.083,-45.373) -43.6,-45.373 ; v1@-43.741,-45.031 ccw(c-44.155,-45.445) -44.155,-44.86 cw(c-44.155,-45.445) v1@-43.741,-45.031 ; v1@-43.741,-45.031 cw(c-44.083,-45.373) -43.6,-45.373 ; -43.6,-45.373 cw(c-43.117,-45.373) v1@-43.459,-45.031 ; -43.6,-45.373 cw(c-43.117,-45.373) v1@-43.459,-45.031 ; v1@-43.459,-45.031 cw(c-43.045,-45.445) -43.045,-44.86 ccw(c-43.045,-45.445) v1@-43.459,-45.031 ; -38.079,-36.439 ccw(c-37.737,-36.78) -38.22,-36.78 cw(c-37.737,-36.78) -38.079,-36.439 ; -38.079,-36.439 cw(c-38.42,-36.097) -38.42,-36.58 ccw(c-38.42,-36.097) -38.079,-36.439 ; -23.631,-36.049 ccw(c-23.29,-35.707) -23.29,-36.19 cw(c-23.29,-35.707) -23.631,-36.049 ; -23.631,-36.049 cw(c-23.973,-36.39) -23.49,-36.39 ccw(c-23.973,-36.39) -23.631,-36.049 ; v1@-21.449,-36.511 cw(c-21.131,-36.829) -21.131,-36.38 ccw(c-21.131,-36.829) v1@-21.449,-36.511 ; v1@-21.449,-36.511 ccw(c-21.083,-36.877) -21.6,-36.877 cw(c-21.083,-36.877) v1@-21.449,-36.511 ; -44.01,-44.86 ccw(c-44.01,-44.48) -43.741,-44.749 cw(c-44.01,-44.48) -44.01,-44.86 ; v1@-43.459,-44.749 ccw(c-43.19,-44.48) -43.19,-44.86 cw(c-43.19,-44.48) v1@-43.459,-44.749 ; v1@-38.561,-36.921 cw(c-38.951,-37.311) -38.4,-37.311 ccw(c-38.951,-37.311) v1@-38.561,-36.921 ; -38.4,-37.215 cw(c-37.985,-37.215) -38.279,-36.921 ccw(c-37.985,-37.215) -38.4,-37.215 ; v1@-21.731,-36.511 cw(c-22.049,-36.829) -21.6,-36.829 ccw(c-22.049,-36.829) v1@-21.731,-36.511 ; v1@-21.449,-36.229 ccw(c-21.083,-35.863) -21.083,-36.38 cw(c-21.083,-35.863) v1@-21.449,-36.229
  TopLayer w0.5: v1(-42.125,-19.565) v1(-28.73,-19.565)
  BottomLayer w0.254: -44.15,-28.45 U4.36@-40.875,-28.45 -34.52,-28.45 ; U4.24@-39.575,-35.25 -39.575,-34.145 -39.36,-33.93 -37.51,-33.93 -36.03,-32.45 -34.52,-32.45 ; U4.48@-34.075,-27.15 -34.075,-28.45 ; -33.73,-28.45 U4.1@-32.775,-28.45 ; R7.1@-28.86,-35 -29.91,-35 -30.56,-34.35 -30.56,-33.45 -31.56,-32.45 U4.9@-32.775,-32.45 -34.52,-32.45 ; C9.1@-28.592,-26.005 -30.185,-26.005 -30.813,-26.633 -30.813,-27.993 -31.27,-28.45 U4.1@-32.775,-28.45 ; -34.52,-32.45 -34.52,-28.45 ; -34.52,-28.45 -34.075,-28.45 ; -34.075,-28.45 U4.1@-32.775,-28.45 ; -29.205,-26.005 ccw(c-29.205,-25.392) -28.772,-25.825 cw(c-29.205,-25.392) -29.205,-26.005 ; -29.205,-26.005 cw(c-29.205,-26.618) -28.772,-26.185 ccw(c-29.205,-26.618) -29.205,-26.005 ; -29.203,-35 ccw(c-29.203,-34.387) -28.77,-34.82 cw(c-29.203,-34.387) -29.203,-35 ; -29.203,-35 cw(c-29.203,-35.613) -28.77,-35.18 ccw(c-29.203,-35.613) -29.203,-35
  BottomLayer w0.3: -51.44,-44.89 v1(-43.6,-44.89) ; v1(-23.29,-36.39) v1@-21.61,-36.39 ; -44.083,-44.89 ccw(c-44.083,-44.407) -43.741,-44.749 cw(c-44.083,-44.407) -44.083,-44.89 ; -44.083,-44.89 cw(c-44.083,-45.373) -43.741,-45.031 ccw(c-44.083,-45.373) -44.083,-44.89 ; -22.807,-36.39 ccw(c-22.807,-36.873) -23.149,-36.531 cw(c-22.807,-36.873) -22.807,-36.39 ; -22.807,-36.39 cw(c-22.807,-35.907) -23.149,-36.249 ccw(c-22.807,-35.907) -22.807,-36.39 ; -22.121,-36.39 ccw(c-22.121,-35.839) -21.731,-36.229 cw(c-22.121,-35.839) -22.121,-36.39 ; -22.025,-36.39 cw(c-22.025,-36.805) -21.731,-36.511 ccw(c-22.025,-36.805) -22.025,-36.39
  BottomLayer w0.4: P4.1@-58.02,-34.22 -57.9,-34.1 -51.97,-34.1 ; -51.44,-44.89 -51.97,-44.36 -51.97,-34.1 ; C3.1@-50.1,-35.75 C8.1@-50.1,-34.1 ; R14.2@-48.408,-32.445 R14.2@-48.43,-32.445 ; -44.15,-30.85 Q2.1@-48.375,-30.85 -48.43,-30.905 R14.2@-48.43,-32.445 ; -51.97,-34.1 C8.1@-50.1,-34.1 ; -50.529,-34.1 ccw(c-50.529,-33.663) -50.22,-33.972 cw(c-50.529,-33.663) -50.529,-34.1 ; -50.529,-34.1 cw(c-50.529,-34.537) C8.1@-50.22,-34.228 ; -50.529,-34.1 cw(c-50.529,-34.537) C8.1@-50.22,-34.228 ; C8.1@-50.22,-34.228 cw(c-50.51,-34.518) -50.1,-34.518 ccw(c-50.51,-34.518) C8.1@-50.22,-34.228 ; C8.1@-50.1,-34.1 -50.085,-34.1 R14.2@-48.43,-32.445 ; -47.754,-30.85 ccw(c-47.754,-31.471) -48.193,-31.032 cw(c-47.754,-31.471) -47.754,-30.85 ; -47.754,-30.85 cw(c-47.754,-30.229) -48.193,-30.668 ccw(c-47.754,-30.229) -47.754,-30.85 ; P4.1@-57.631,-34.609 cw(c-56.402,-35.838) -56.402,-34.1 ccw(c-56.402,-35.838) P4.1@-57.631,-34.609 ; P4.1@-57.631,-33.831 ccw(c-56.982,-33.182) -56.982,-34.1 cw(c-56.982,-33.182) P4.1@-57.631,-33.831 ; C3.1@-50.22,-35.622 ccw(c-50.51,-35.332) -50.1,-35.332 cw(c-50.51,-35.332) C3.1@-50.22,-35.622 ; -50.1,-35.294 ccw(c-49.636,-35.294) -49.964,-35.622 cw(c-49.636,-35.294) -50.1,-35.294 ; -50.1,-34.556 cw(c-49.636,-34.556) -49.964,-34.228 ccw(c-49.636,-34.556) -50.1,-34.556 ; C8.1@-50.092,-33.919 ccw(c-50.092,-33.465) -49.771,-33.786 cw(c-50.092,-33.465) C8.1@-50.092,-33.919 ; C8.1@-49.911,-34.1 cw(c-49.491,-34.1) -49.788,-33.803 ccw(c-49.491,-34.1) C8.1@-49.911,-34.1 ; -48.971,-32.986 ccw(c-49.512,-32.445) -48.747,-32.445 cw(c-49.512,-32.445) -48.971,-32.986 ; R14.2@-48.694,-32.317 ccw(c-49.331,-31.68) -48.43,-31.68 cw(c-49.331,-31.68) R14.2@-48.694,-32.317 ; Q2.1@-48.557,-31.075 cw(c-48.863,-31.381) -48.43,-31.381 ccw(c-48.863,-31.381) Q2.1@-48.557,-31.075 ; -48.43,-31.647 cw(c-47.621,-31.647) -48.193,-31.075 ccw(c-47.621,-31.647) -48.43,-31.647
  BottomLayer w0.5: C7.1@-43.353,-39.174 -43.353,-38.09 ; U5.8@-42.125,-16.55 v1(-42.125,-19.565) -42.125,-24.895 -44.15,-26.92 -44.15,-28.45 -44.15,-30.85 -44.15,-34.837 -43.353,-35.633 -43.353,-38.09 ; v1(-38.42,-36.78) -39.73,-38.09 -43.353,-38.09
  BottomLayer w1: U1.2@-28.725,-21.75 U1.2@-28.725,-15.95 ; -28.725,-17.157 ccw(c-29.932,-17.157) -29.079,-16.304 cw(c-29.932,-17.157) -28.725,-17.157 ; -28.725,-17.157 cw(c-27.518,-17.157) -28.371,-16.304 ccw(c-27.518,-17.157) -28.725,-17.157
DVDD5.0: C1.1 R3.2 U3.5 | length 9.7
  BottomLayer w0.4: C1.1@-48.568,-25.595 -48.568,-27.047 R3.2@-48.405,-27.21 ; C1.1@-48.39,-25.695 -46.675,-25.695 -46.3,-25.32 U3.5@-46.3,-23.5 ; -48.568,-26.032 ccw(c-49.005,-26.032) -48.696,-25.723 cw(c-49.005,-26.032) -48.568,-26.032 ; -48.568,-26.032 cw(c-48.131,-26.032) -48.44,-25.723 ccw(c-48.131,-26.032) -48.568,-26.032 ; R3.2@-48.694,-27.082 ccw(c-48.998,-26.778) -48.568,-26.778 cw(c-48.998,-26.778) R3.2@-48.694,-27.082 ; -48.568,-26.768 ccw(c-48.124,-26.768) -48.438,-27.082 cw(c-48.124,-26.768) -48.568,-26.768 ; C1.1@-48.44,-25.467 ccw(c-47.89,-24.917) -47.89,-25.695 cw(c-47.89,-24.917) C1.1@-48.44,-25.467
KEY_1: C5.1 D3.2 R7.2 R9.1 S1.1 U4.18 | length 80.4
  TopLayer w0.254: v1(-36.15,-33.54) -36.15,-34.98 -35.34,-35.79 v1(-30.36,-35.79) ; v1@-30.36,-35.931 v1@-30.239,-35.931 ; v1(-10.998,-16.588) S1.1@-10,-16.588 ; -36.15,-34.078 ccw(c-36.688,-34.078) -36.308,-33.698 cw(c-36.688,-34.078) -36.15,-34.078 ; -36.15,-34.078 cw(c-35.612,-34.078) -35.992,-33.698 ccw(c-35.612,-34.078) -36.15,-34.078 ; -30.898,-35.79 ccw(c-30.898,-35.252) -30.518,-35.632 cw(c-30.898,-35.252) -30.898,-35.79 ; -30.898,-35.79 cw(c-30.898,-36.328) -30.518,-35.948 ccw(c-30.898,-36.328) -30.898,-35.79 ; -10.613,-16.588 ccw(c-10.613,-15.975) -10.18,-16.408 cw(c-10.613,-15.975) -10.613,-16.588 ; -10.613,-16.588 cw(c-10.613,-17.201) -10.18,-16.768 ccw(c-10.613,-17.201) -10.613,-16.588 ; -10.46,-16.588 ccw(c-10.46,-17.126) -10.84,-16.746 cw(c-10.46,-17.126) -10.46,-16.588 ; -10.46,-16.588 cw(c-10.46,-16.05) -10.84,-16.43 ccw(c-10.46,-16.05) -10.46,-16.588
  BottomLayer w0.254: U4.18@-36.575,-35.25 -36.575,-33.965 v1(-36.15,-33.54) ; v1(-30.36,-35.79) -29.519,-36.631 C5.1@-28.592,-36.631 ; R9.1@-27.229,-38.263 R9.1@-27.2,-38.263 ; R7.2@-27.229,-35 -27.2,-35 -27.19,-35.01 -27.19,-35.229 C5.1@-28.592,-36.631 ; D3.2@-12.438,-16.588 D3.2@-12.45,-16.6 ; v1(-10.998,-16.588) -11.01,-16.6 D3.2@-12.45,-16.6 ; -36.531,-33.921 ccw(c-36.911,-33.54) -36.373,-33.54 cw(c-36.911,-33.54) -36.531,-33.921 ; -36.531,-33.921 cw(c-36.15,-34.301) -36.15,-33.763 ccw(c-36.15,-34.301) -36.531,-33.921 ; -29.979,-36.171 ccw(c-30.36,-36.551) -30.36,-36.013 cw(c-30.36,-36.551) -29.979,-36.171 ; -29.979,-36.171 cw(c-29.599,-35.79) -30.137,-35.79 ccw(c-29.599,-35.79) -29.979,-36.171 ; -29.205,-36.631 ccw(c-29.205,-36.018) -28.772,-36.452 cw(c-29.205,-36.018) -29.205,-36.631 ; -29.205,-36.631 cw(c-29.205,-37.244) -28.772,-36.811 ccw(c-29.205,-37.244) -29.205,-36.631 ; C5.1@-28.592,-36.631 -27.07,-38.153 R9.1@-27.07,-38.263 -26.21,-38.263 -25.72,-37.773 -24.49,-37.773 -15.723,-37.773 -13.37,-35.42 -13.37,-26.87 -12.626,-26.126 D3.2@-12.626,-16.6 D3.2@-12.45,-16.6 ; C5.1@-28.338,-36.631 cw(c-27.725,-36.631) -28.158,-36.198 ; C5.1@-28.338,-36.631 ccw(c-27.725,-36.631) -28.158,-37.065 ; C5.1@-28.338,-36.631 cw(c-27.725,-36.631) -28.158,-36.198 ; C5.1@-28.338,-36.631 ccw(c-27.725,-36.631) -28.158,-37.065 ; -28.158,-37.065 ccw(c-28.592,-37.498) -28.592,-36.885 cw(c-28.592,-37.498) -28.158,-37.065 ; -28.158,-36.198 cw(c-28.592,-35.764) -28.592,-36.377 ccw(c-28.592,-35.764) -28.158,-36.198 ; -26.457,-38.263 ccw(c-26.457,-38.876) -26.89,-38.442 cw(c-26.457,-38.876) -26.457,-38.263 ; -26.457,-38.263 cw(c-26.457,-37.649) -26.89,-38.083 ccw(c-26.457,-37.649) -26.457,-38.263 ; -12.626,-17.213 ccw(c-13.239,-17.213) -12.806,-16.78 cw(c-13.239,-17.213) -12.626,-17.213 ; -12.626,-17.213 cw(c-12.013,-17.213) D3.2@-12.446,-16.78 ; -12.626,-17.213 cw(c-12.013,-17.213) D3.2@-12.446,-16.78 ; D3.2@-12.446,-16.78 cw(c-12.013,-17.213) -12.013,-16.6 ; D3.2@-12.446,-16.78 cw(c-12.013,-17.213) -12.013,-16.6 ; -12.013,-16.6 cw(c-12.013,-15.987) -12.446,-16.42 ccw(c-12.013,-15.987) -12.013,-16.6 ; -27.581,-37.642 cw(c-28.201,-38.263) -27.324,-38.263 ccw(c-28.201,-38.263) -27.581,-37.642 ; -27.574,-35.613 ccw(c-28.187,-35) -27.32,-35 cw(c-28.187,-35) -27.574,-35.613 ; R7.2@-27.32,-35.359 cw(c-27.066,-35.613) -27.066,-35.254 ccw(c-27.066,-35.613) R7.2@-27.32,-35.359 ; R9.1@-27.317,-37.906 ccw(c-27.07,-37.659) -27.07,-38.009 cw(c-27.07,-37.659) R9.1@-27.317,-37.906 ; -11.565,-16.6 ccw(c-11.565,-16.021) -11.156,-16.43 cw(c-11.565,-16.021) -11.565,-16.6 ; -11.507,-16.6 cw(c-11.507,-17.097) -11.156,-16.746 ccw(c-11.507,-17.097) -11.507,-16.6
KEY_2: D4.2 R9.2 R11.1 S2.1 | length 44.4
  TopLayer w0.254: v1@-11.339,-28.059 S2.1@-10,-28.059 ; -10.613,-28.059 ccw(c-10.613,-27.445) -10.18,-27.879 cw(c-10.613,-27.445) -10.613,-28.059 ; -10.613,-28.059 cw(c-10.613,-28.672) -10.18,-28.238 ccw(c-10.613,-28.672) -10.613,-28.059 ; v1@-11.192,-28.228 cw(c-10.784,-28.636) -10.784,-28.059 ccw(c-10.784,-28.636) v1@-11.192,-28.228 ; v1@-11.192,-27.912 ccw(c-10.839,-27.559) -10.839,-28.059 cw(c-10.839,-27.559) v1@-11.192,-27.912
  BottomLayer w0.254: R9.2@-28.86,-38.263 -27.229,-39.894 -27.2,-39.894 R11.1@-27.07,-39.894 ; R11.1@-27.036,-39.894 R11.1@-27.07,-39.894 ; v1(-11.35,-28.07) -12.606,-28.07 D4.2@-12.626,-28.05 -12.626,-35.323 -15.533,-38.23 -24.58,-38.23 -25.406,-38.23 R11.1@-27.07,-39.894 ; R11.1@-27.07,-39.64 cw(c-27.07,-38.643) -27.775,-39.348 ccw(c-27.07,-38.643) R11.1@-27.07,-39.64 ; R11.1@-27.07,-39.64 ccw(c-27.07,-39.027) -26.636,-39.46 ; R11.1@-27.07,-39.64 ccw(c-27.07,-39.027) -26.636,-39.46 ; -26.636,-39.46 ccw(c-26.203,-39.894) -26.816,-39.894 cw(c-26.203,-39.894) -26.636,-39.46 ; -12.626,-28.663 ccw(c-13.239,-28.663) -12.806,-28.23 cw(c-13.239,-28.663) -12.626,-28.663 ; -12.626,-28.663 cw(c-12.013,-28.663) D4.2@-12.446,-28.23 ; -12.626,-28.663 cw(c-12.013,-28.663) D4.2@-12.446,-28.23 ; D4.2@-12.446,-28.23 cw(c-12.061,-28.615) -12.061,-28.07 ccw(c-12.061,-28.615) D4.2@-12.446,-28.23 ; -11.888,-28.07 ccw(c-11.888,-27.532) -11.508,-27.912 cw(c-11.888,-27.532) -11.888,-28.07 ; -11.888,-28.07 cw(c-11.888,-28.608) -11.508,-28.228 ccw(c-11.888,-28.608) -11.888,-28.07 ; R9.2@-28.594,-38.263 ccw(c-27.952,-38.263) -28.406,-38.717 cw(c-27.952,-38.263) R9.2@-28.594,-38.263 ; R9.2@-28.34,-38.263 ccw(c-27.085,-38.263) -27.972,-39.15 cw(c-27.085,-38.263) R9.2@-28.34,-38.263 ; D4.2@-12.446,-27.87 ccw(c-11.965,-27.389) -11.965,-28.07 cw(c-11.965,-27.389) D4.2@-12.446,-27.87
KEY_3: D5.2 R11.2 R12.1 S3.1 | length 34.5
  TopLayer w0.254: v1@-11.349,-39.529 S3.1@-10,-39.529 ; -10.613,-39.529 ccw(c-10.613,-38.916) -10.18,-39.35 cw(c-10.613,-38.916) -10.613,-39.529 ; -10.613,-39.529 cw(c-10.613,-40.143) -10.18,-39.709 ccw(c-10.613,-40.143) -10.613,-39.529 ; v1@-11.192,-39.688 cw(c-10.81,-40.07) -10.81,-39.529 ccw(c-10.81,-40.07) v1@-11.192,-39.688 ; v1@-11.192,-39.372 ccw(c-10.813,-38.993) -10.813,-39.529 cw(c-10.813,-38.993) v1@-11.192,-39.372
  BottomLayer w0.254: R11.2@-28.594,-39.894 -28.594,-40.68 ; R12.1@-28.59,-41.525 -28.594,-41.521 -28.594,-40.68 ; D5.2@-12.626,-39.53 -13.436,-38.72 -24.551,-38.72 -26.511,-40.68 -28.594,-40.68 ; D5.2@-12.538,-39.442 -12.45,-39.53 v1(-11.35,-39.53) v1@-11.43,-39.45 ; -28.594,-40.507 ccw(c-29.207,-40.507) -28.774,-40.073 cw(c-29.207,-40.507) -28.594,-40.507 ; -28.594,-40.507 cw(c-27.981,-40.507) -28.414,-40.073 ccw(c-27.981,-40.507) -28.594,-40.507 ; -13.06,-39.096 ccw(c-12.626,-38.663) -12.626,-39.276 cw(c-12.626,-38.663) -13.06,-39.096 ; -13.06,-39.096 cw(c-13.493,-39.53) -12.88,-39.53 ccw(c-13.493,-39.53) -13.06,-39.096 ; -12.013,-39.53 ccw(c-12.013,-40.143) -12.446,-39.71 cw(c-12.013,-40.143) -12.013,-39.53 ; -12.013,-39.53 cw(c-12.013,-38.917) -12.446,-39.35 ccw(c-12.013,-38.917) -12.013,-39.53 ; -11.888,-39.53 ccw(c-11.888,-38.992) -11.508,-39.372 cw(c-11.888,-38.992) -11.888,-39.53 ; -11.888,-39.53 cw(c-11.888,-40.068) -11.508,-39.688 ccw(c-11.888,-40.068) -11.888,-39.53 ; R12.1@-28.77,-41.345 ccw(c-29.194,-40.921) -28.594,-40.921 cw(c-29.194,-40.921) R12.1@-28.77,-41.345 ; -28.594,-40.902 ccw(c-27.967,-40.902) -28.41,-41.345 cw(c-27.967,-40.902) -28.594,-40.902
KEY_4: D6.2 R12.2 S4.1 | length 38.7
  TopLayer w0.254: v1(-11.39,-51.03) -11.36,-51 S4.1@-10,-51 ; -10.613,-51 ccw(c-10.613,-50.387) -10.18,-50.82 cw(c-10.613,-50.387) -10.613,-51 ; -10.613,-51 cw(c-10.613,-51.613) -10.18,-51.18 ccw(c-10.613,-51.613) -10.613,-51 ; v1@-11.232,-51.188 cw(c-10.779,-51.641) -10.779,-51 ccw(c-10.779,-51.641) v1@-11.232,-51.188 ; v1@-11.232,-50.872 ccw(c-10.924,-50.564) -10.924,-51 cw(c-10.924,-50.564) v1@-11.232,-50.872
  BottomLayer w0.254: R12.2@-27.2,-41.525 -26.165,-41.525 -25.13,-40.49 -24.01,-40.49 -13.34,-40.49 -12.626,-41.204 D6.2@-12.626,-51.025 ; D6.2@-12.45,-51.025 v1@-11.395,-51.025 ; -26.453,-41.525 ccw(c-26.453,-42.138) -26.886,-41.705 cw(c-26.453,-42.138) -26.453,-41.525 ; -26.453,-41.525 cw(c-26.453,-40.912) -26.886,-41.345 ccw(c-26.453,-40.912) -26.453,-41.525 ; -12.626,-50.412 ccw(c-12.013,-50.412) D6.2@-12.446,-50.845 ; -12.626,-50.412 cw(c-13.239,-50.412) -12.806,-50.845 ccw(c-13.239,-50.412) -12.626,-50.412 ; -12.626,-50.412 ccw(c-12.013,-50.412) D6.2@-12.446,-50.845 ; D6.2@-12.446,-50.845 ccw(c-12.013,-50.412) -12.013,-51.025 ; D6.2@-12.446,-50.845 ccw(c-12.013,-50.412) -12.013,-51.025 ; -12.013,-51.025 ccw(c-12.013,-51.638) -12.446,-51.205 cw(c-12.013,-51.638) -12.013,-51.025 ; -11.94,-51.025 cw(c-11.94,-51.58) -11.548,-51.188 ccw(c-11.94,-51.58) -11.94,-51.025 ; -11.916,-51.025 ccw(c-11.916,-50.504) -11.548,-50.872 cw(c-11.916,-50.504) -11.916,-51.025
LCD_BLEN: R4.2 U4.19 | length 15.4
  BottomLayer w0.254: R4.2@-46.625,-39.31 -45.91,-40.025 -39.145,-40.025 -37.075,-37.955 U4.19@-37.075,-35.25 ; R4.2@-46.625,-39.174 R4.2@-46.557,-39.242 ; -46.191,-39.743 ccw(c-46.625,-40.177) -46.625,-39.564 cw(c-46.625,-40.177) -46.191,-39.743 ; -46.191,-39.743 cw(c-45.758,-39.31) -46.371,-39.31 ccw(c-45.758,-39.31) -46.191,-39.743
LCD_CS: P1.1_12 P1.2_7 U4.25 | length 17.7
  TopLayer w0.254: v1(-41.6,-34.78) P1.2_7@-41.6,-39.318 -41.6,-44.5 -41.2,-44.9 P1.1_12@-41.2,-47.518 ; -41.6,-35.318 ccw(c-42.138,-35.318) -41.758,-34.938 cw(c-42.138,-35.318) -41.6,-35.318 ; -41.6,-35.318 cw(c-41.062,-35.318) -41.442,-34.938 ccw(c-41.062,-35.318) -41.6,-35.318
  BottomLayer w0.254: v1(-41.6,-34.78) -41.04,-34.78 -40.86,-34.6 U4.25@-40.86,-33.965 ; -41.062,-34.78 ccw(c-41.062,-35.318) -41.442,-34.938 cw(c-41.062,-35.318) -41.062,-34.78 ; -41.062,-34.78 cw(c-41.062,-34.242) -41.442,-34.622 ccw(c-41.062,-34.242) -41.062,-34.78